# Altium PCB BACK_UP_04_10_Analizador_de_espectro.PcbDoc
Units mm, origin at the board's own origin, x right, y up, seen from the top; angles counter-clockwise.
Board outline 152.4 x 101.6 mm, 2 copper layers (Top Layer, Bottom Layer); 140 components, 98 nets, 612 pads, 218 vias.
Unrouted connection lines stored in the file: 103.
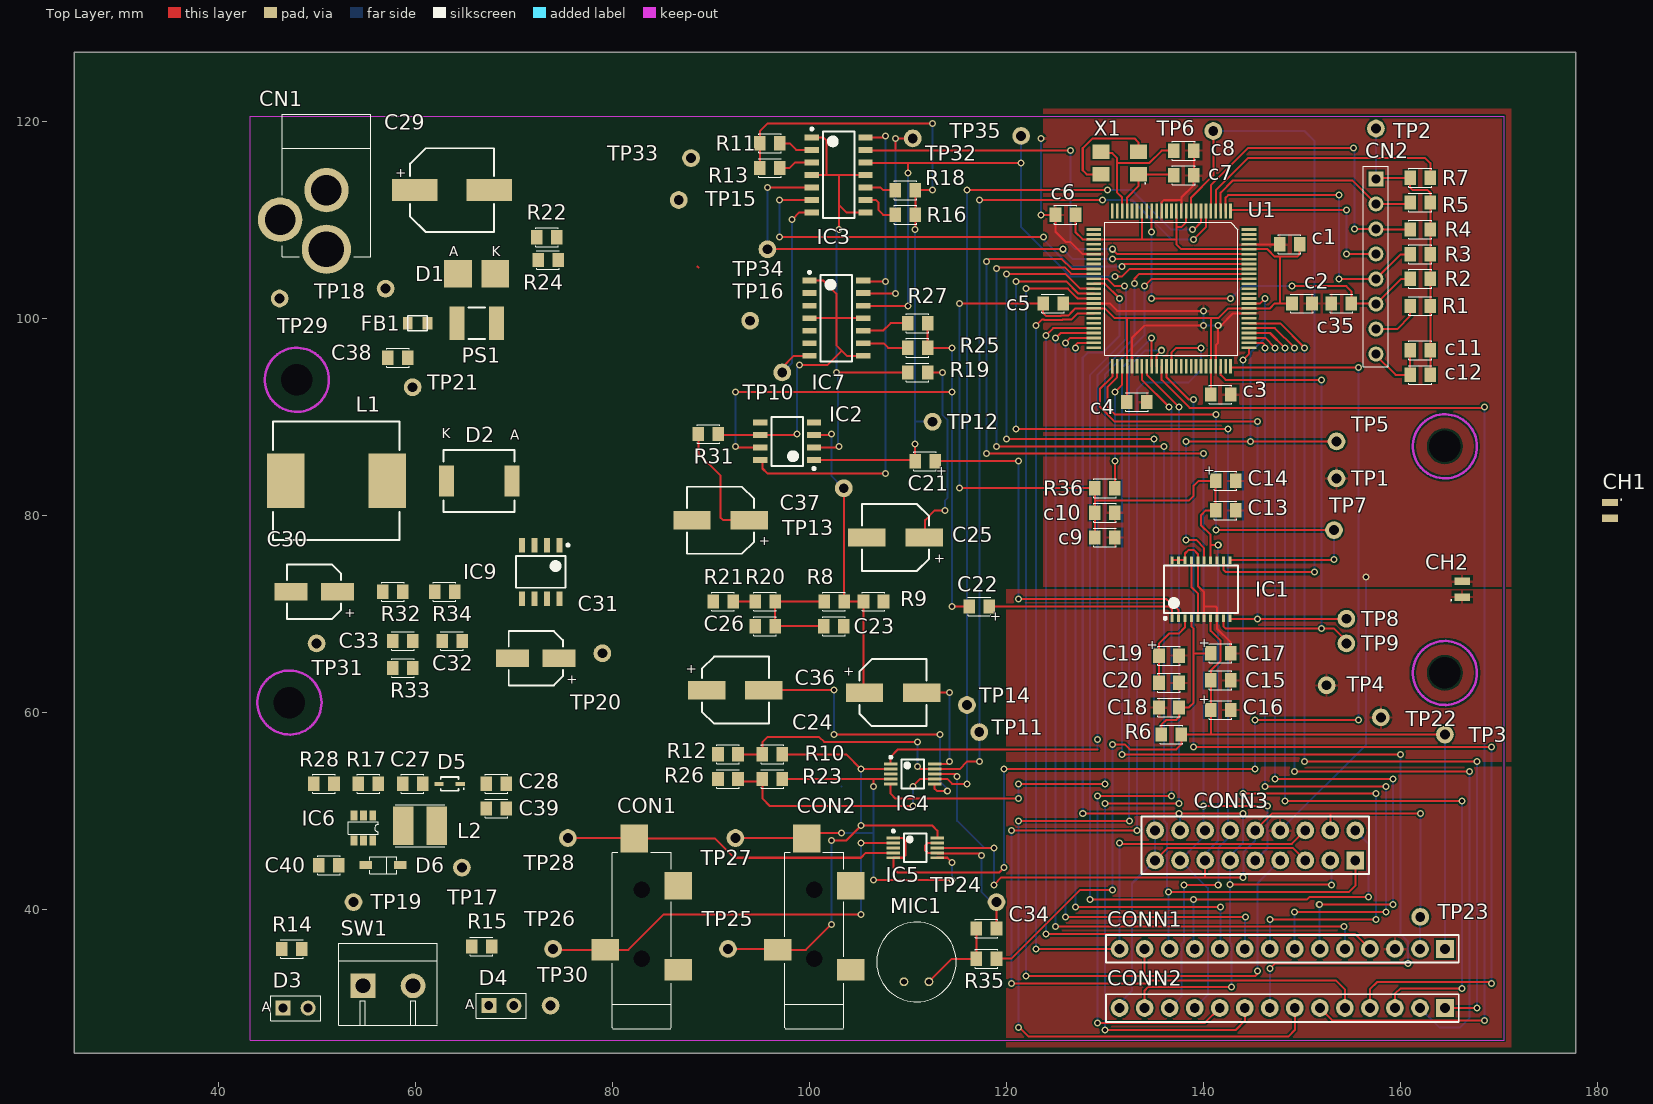
[diagram p0: Top Layer view]
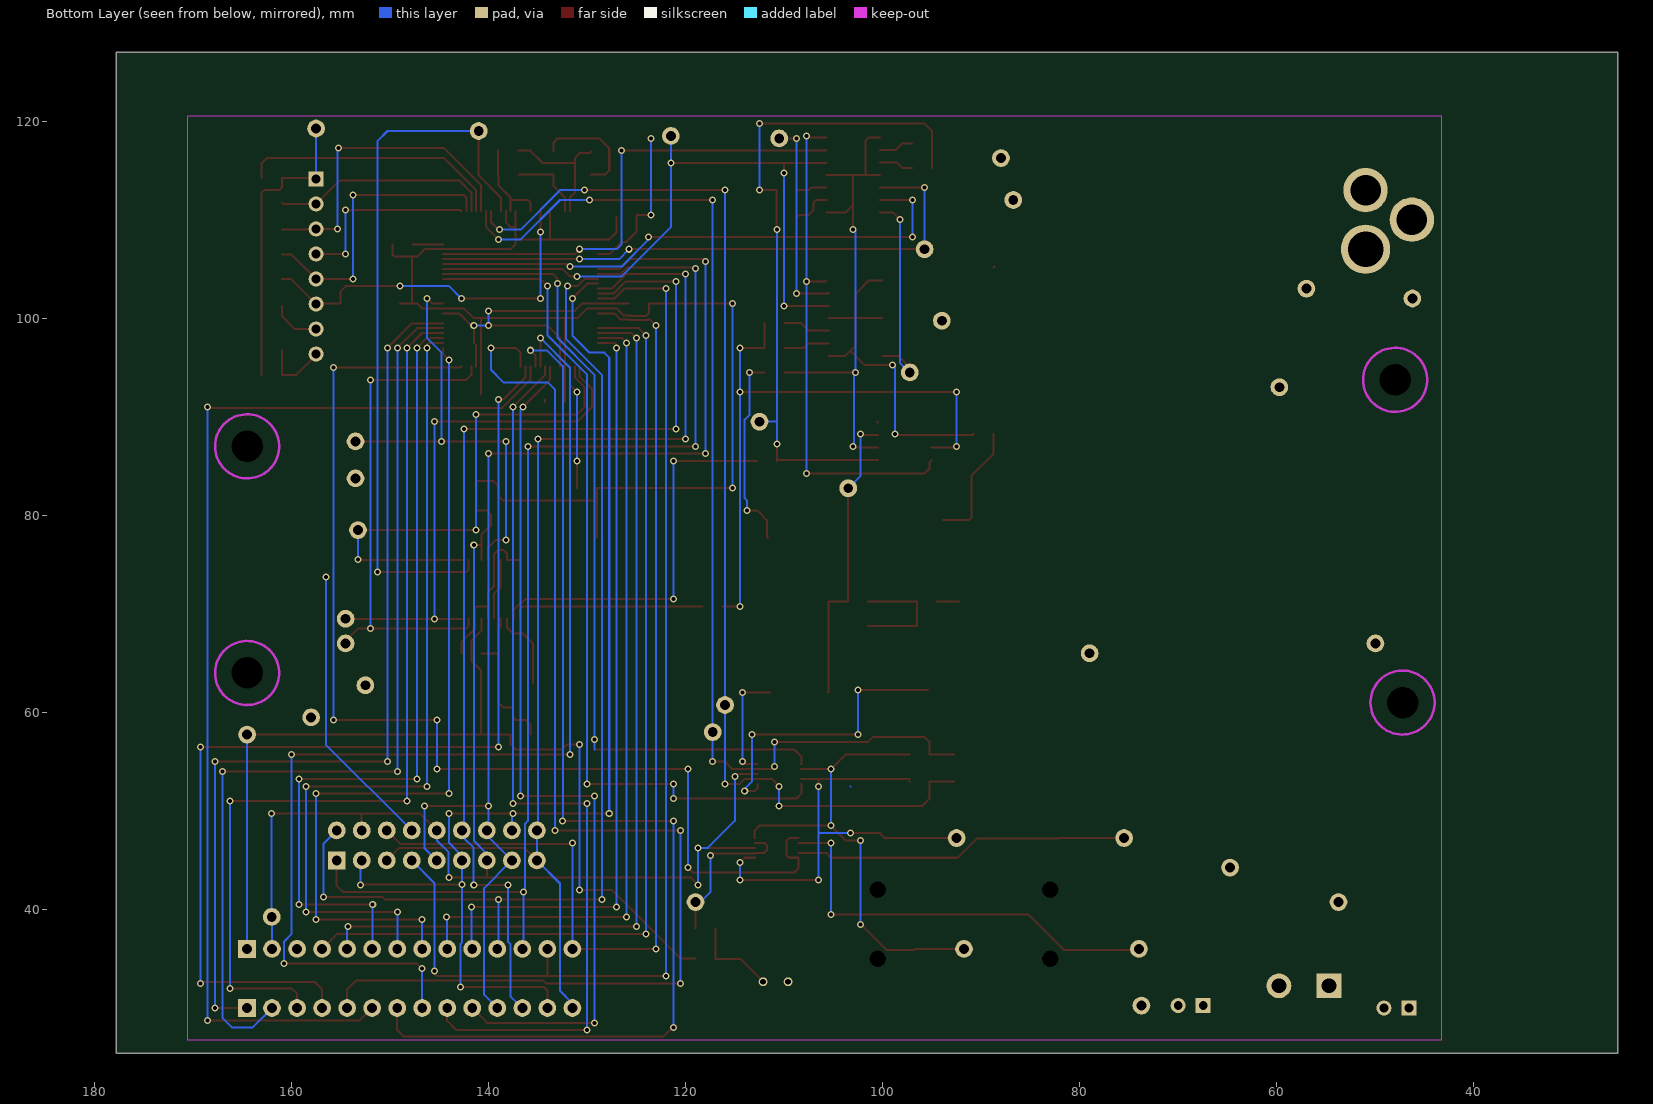
[diagram p1: Bottom Layer view, seen from below]

## Layer stack, top to bottom
Top Solder: solder mask 0.0102, Solder Resist, Dk 3.5
Top Layer: signal copper 0.0356
Dielectric 1: dielectric 0.32, FR-4, Dk 4.8
Bottom Layer: signal copper 0.0356
Bottom Solder: solder mask 0.0102, Solder Resist, Dk 3.5

## Board outline
25.4,25.4 177.8,25.4 177.8,127 25.4,127

## Design rules (kind name [scope] priority, off if disabled: settings)
Clearance [All] p1: gap=0.203
PolygonConnect [All] p1: connectstyle=Relief reliefconductorwidth=0.254 reliefentries=4 polygonreliefangle="90 Angle" airgapwidth=0.254
RoutingVias [All] p1: holewidth=0.406 width=0.711 viastyle="Through Hole" minholewidth=0.406 minwidth=0.711 maxholewidth=0.406 maxwidth=0.711
SolderMaskExpansion [All] p1: expansion=0.102
Width [All] p1: maxlimit=6.35 minlimit=0.203 preferedwidth=0.203
30 further rules are at their usual default settings.

## Classes and differential pairs
component class U_adc: C13 C14 C15 C16 C17 C18 C19 C20 C21 C22 IC1 R6 TP1 TP2 TP3 TP4 TP5 TP6 TP7 TP8 TP9 TP10
component class U_AGC: C23 C24 C25 C26 C36 C37 IC2 IC3 IC4 IC7 R8 R9 R10 R11 R12 R13 R16 R18 R19 R20 R21 R22 R23 R24 R25 R26 R27 R31 TP11 TP12 TP13 TP14 TP15 TP16 TP32 TP33 TP34 TP35
component class U_Fuente: C27 C28 C29 C30 C31 C32 C33 C38 C39 C40 CH1 CH2 CN1 D1 D2 D3 D4 D5 D6 FB1 IC6 IC9 L1 L2 PS1 R14 R15 R17 R28 R32 R33 R34 SW1 TP17 TP18 TP19 TP20 TP21 TP29 TP30 TP31
component class U_Signal_imputs: C34 CON1 CON2 IC5 MIC1 R35 TP22 TP23 TP24 TP25 TP26 TP27 TP28
component class U_uc: c1 c2 c3 c4 c5 c6 c7 c8 c9 c10 c11 c12 c35 CN2 CONN1 CONN2 CONN3 R1 R2 R3 R4 R5 R7 R36 U1 X1

## Components (designator, comment, footprint, x,y, rotation, side; value= is the part's Value field where it differs from the comment)
c1 "100nF 25V X7R Ceramic" C_0805 148.75,107.5 r180 top
c2 "100nF 25V X7R Ceramic" C_0805 150,101.5 r0 top
c3 "100nF 25V X7R Ceramic" C_0805 141.75,92.25 r0 top
c4 "100nF 25V X7R Ceramic" C_0805 133.25,91.5 r0 top
c5 "100nF 25V X7R Ceramic" C_0805 124.75,101.5 r0 top
c6 "100nF 25V X7R Ceramic" C_0805 126,110.5 r180 top
c7 "18pF 50V COG Ceramic" C_0805 138,114.5 r180 top
c8 "18pF 50V COG Ceramic" C_0805 138,117 r180 top
c9 "1uF 6V3 X7R Ceramic" C_0805 130,77.75 r0 top
c10 "10nF 25V X7R Ceramic" C_0805 130,80.25 r0 top
c11 "10nF 25V X7R Ceramic" C_0805 162,96.75 r180 top
c12 "100nF 25V X7R Ceramic" C_0805 162,94.25 r180 top
C13 "100nF 16V Ceramic" C_0805 142.25,80.5 r180 top
C14 "10uF 6V3 Tantalium" C_0805_POL 142.25,83.5 r0 top
C15 "100nF 16V Ceramic" C_0805 141.75,63.25 r180 top
C16 "10uF 6V3 Tantalium" C_0805_POL 141.75,60.25 r0 top
C17 "10uF 6V3 Tantalium" C_0805_POL 141.75,66 r0 top
C18 "100nF 16V Ceramic" C_0805 136.5,60.5 r0 top
C19 "10uF 6V3 Tantalium" C_0805_POL 136.5,65.75 r0 top
C20 "100nF 16V Ceramic" C_0805 136.5,63 r180 top
C21 "1uF 16V Tantalium" C_0805_POL 111.75,85.5 r180 top
C22 "1uF 16V Tantalium" C_0805_POL 117.25,70.75 r180 top
C23 "1uF 16V Ceramic" C_0805 102.5,68.75 r0 top
C24 "100uF 16V Elect. Alum." C_AE7066X54M 108.5,62 r0 top
C25 "100uF 16V Elect. Alum." C_AE7066X54M 108.75,77.75 r180 top
C26 "1uF 16V Ceramic" C_0805 95.516,68.75 r180 top
C27 "100nF 16V X7R" C_0805 59.75,52.75 r180 top
C28 "10uF 10V X7R" C_0805 68.25,52.75 r0 top
C29 "100uF 50V ElecAlum" C_AE10083X105M 63.75,113 r0 top
C30 "100uF 6V3 ElecAlum" C_AE6553X54M 49.75,72.25 r180 top
C31 "4.7uF 50V ElecAlum" C_AE6553X54M 72.25,65.5 r180 top
C32 "15nF 50V Ceramic" C_0805 63.75,67.25 r0 top
C33 "100pF 25V Ceramic" C_0805 58.75,67.25 r180 top
C34 "2.2u 6V3 X5R Ceramic" C_0805 117.979,38.06 r0 top
c35 "100nF 25V X7R Ceramic" C_0805 154,101.5 r180 top
C36 "100uF 16V Elect. Alum." C_AE7066X54M 92.5,62.25 r0 top
C37 "100uF 16V Elect. Alum." C_AE7066X54M 91,79.5 r180 top
C38 "100nF 35V Ceramic" C_0805 58.25,96 r180 top
C39 "10uF 10V X7R" C_0805 68.25,50.25 r0 top
C40 "2.2uF 50V X7R" C_0805 51.25,44.5 r0 top
CH1 "Choke" I_CHOQUE_DFN 181.25,80.5 r270 top
CH2 "Choke" I_CHOQUE_DFN 166.25,72.5 r90 top
CN1 "DC Jack" Jack_PJ002A 51,107 r90 top
CN2 "CONN_82" HDR_M_08P_0.1 157.5,105.25 r270 top
CON1 "AUD_IN" "AUDIO_JACK 3.5MM SMD" 83,38.5 r90 top
CON2 "AUD_IN" "AUDIO_JACK 3.5MM SMD" 100.5,38.5 r90 top
CONN1 "CON_14" "1x14x2.54 Pin Header TH V" 148,36 r180 top
CONN2 "CON_14" "1x14x2.54 Pin Header TH V" 148,30 r180 top
CONN3 "CON_18" "2x9x2.54 Pin Header TH V" 145.25,46.5 r180 top
D1 "CDBA140-G" D_DO-214AC_SCHOTTKY 66.25,104.5 r0 top
D2 "STPS3L40" D_M6959X25N 66.5,83.5 r180 top
D3 "LED" LED_TH 47.87,30 r0 top
D4 "LED" LED_TH 68.75,30.25 r0 top
D5 "1N4148WS" 1N4148WS 63.5,52.75 r180 top
D6 "MBRX160TP" SOD_123 56.75,44.5 r180 top
FB1 "Ferrite Bead" Ferrite_bead 61.25,99.5 r180 top
IC1 "PCM1802" SSOP_DB20 139.75,72.5 r90 top
IC2 "MCP6022" SOIC_D8 97.75,87.5 r180 top
IC3 "74LVC4066" SO14 102.985,114.549 r0 top
IC4 "TS5A23157" TSSOP50P490X110-10N 110.5,53.75 r0 top
IC5 "TS5A23157" TSSOP50P490X110-10N 110.75,46.25 r0 top
IC6 "MCP" SOT23_6P 54.75,48.25 r180 top
IC7 "74LVC4066" SO14 102.75,100 r0 top
IC9 "L5972D" SO8 72.75,74.25 r270 top
L1 "47uH" I_P128122X60N 26.25,97.25 r180 top
L2 "LQH44PN220MP0L" VLCF5028 60.5,48.5 r0 top
MIC1 "Mic" MIC_CMA-4544PF-W 110.871,34.671 r270 top
PS1 "Polyswitch" POLISWITCH_1 66.25,99.5 r180 top
R1 "10k 5% 1/8W" R_0805 162,101.25 r0 top
R2 "10k 5% 1/8W" R_0805 162,104 r0 top
R3 "10k 5% 1/8W" R_0805 162,106.5 r0 top
R4 "10k 5% 1/8W" R_0805 162,109 r0 top
R5 "10k 5% 1/8W" R_0805 162,111.75 r0 top
R6 "1k 1/8W" R_0805 136.75,57.75 r180 top
R7 "10k 5% 1/8W" R_0805 162,114.25 r180 top
R8 "100k 1/8W" R_0805 102.516,71.25 r180 top
R9 "100k 1/8W" R_0805 106.516,71.25 r180 top
R10 "100k 1/8W" R_0805 96.25,55.75 r180 top
R11 "590 1/8W" R_0805 96,117.75 r0 top
R12 "33k 1/8W" R_0805 91.75,55.75 r180 top
R13 "2k2 1/8W" R_0805 96,115.25 r0 top
R14 "Res1" R_0805 47.5,36 r180 top
R15 "Res1" R_0805 66.75,36.25 r180 top
R16 "3k9 1/8W" R_0805 109.75,110.5 r180 top
R17 "30k9 1%" R_0805 55.25,52.75 r0 top
R18 "100k 1/8W" R_0805 109.75,113 r180 top
R19 "1k 1/8W" R_0805 111,94.5 r0 top
R20 "100k 1/8W" R_0805 95.516,71.25 r0 top
R21 "100k 1/8W" R_0805 91.266,71.25 r0 top
R22 "590 1/8W" R_0805 73.374,108.204 r0 top
R23 "100k 1/8W" R_0805 96.25,53.25 r180 top
R24 "2k2 1/8W" R_0805 73.501,105.918 r0 top
R25 "3k9 1/8W" R_0805 111,97 r180 top
R26 "33k 1/8W" R_0805 91.75,53.25 r180 top
R27 "100k 1/8W" R_0805 111,99.5 r180 top
R28 "30k9 1%" R_0805 50.75,52.75 r0 top
R31 "1k 1/8W" R_0805 89.75,88.25 r180 top
R32 "8k2 1/4W" R_0805 57.75,72.25 r0 top
R33 "10k 1/4W" R_0805 58.75,64.5 r0 top
R34 "5k1 1/4W" R_0805 63,72.25 r180 top
R35 "2k2 1/8W" R_0805 117.979,35.012 r0 top
R36 "10k 5% 1/8W" R_0805 130,82.75 r180 top
SW1 "Switch" BORNERA_2X5MM 57.25,32.25 r180 top
TP1 "TP" TP 153.5,83.75 r0 top
TP2 "TP" TP 157.5,119.25 r0 top
TP3 "TP" TP 164.5,57.75 r0 top
TP4 "TP" TP 152.5,62.75 r0 top
TP5 "TP" TP 153.5,87.5 r0 top
TP6 "TP" TP 141,119 r0 top
TP7 "TP" TP 153.25,78.5 r0 top
TP8 "TP" TP 154.5,69.5 r0 top
TP9 "TP" TP 154.5,67 r0 top
TP10 "TP" TP 97.25,94.5 r90 top
TP11 "TP" TP 117.25,58 r0 top
TP12 "TP" TP 112.5,89.5 r90 top
TP13 "TP" TP 103.5,82.75 r90 top
TP14 "TP" TP 116,60.75 r90 top
TP15 "TP" TP 86.75,112 r90 top
TP16 "TP" TP 94,99.75 r90 top
TP17 "TP" TP 64.75,44.25 r90 top
TP18 "TP" TP 57,103 r90 top
TP19 "TP" TP 53.75,40.75 r90 top
TP20 "TP" TP 79,66 r90 top
TP21 "TP" TP 59.75,93 r0 top
TP22 "TP" TP 158,59.5 r90 top
TP23 "TP" TP 162,39.25 r90 top
TP24 "TP" TP 119,40.75 r90 top
TP25 "TP" TP 91.75,36 r90 top
TP26 "TP" TP 74,36 r90 top
TP27 "TP" TP 92.5,47.25 r90 top
TP28 "TP" TP 75.5,47.25 r90 top
TP29 "TP" TP 46.25,102 r90 top
TP30 "TP" TP 73.75,30.25 r90 top
TP31 "TP" TP 50,67 r0 top
TP32 "TP" TP 110.5,118.25 r90 top
TP33 "TP" TP 88,116.25 r90 top
TP34 "TP" TP 95.75,107 r90 top
TP35 "TP" TP 121.5,118.5 r90 top
U1 "LPC1769FBD100" LQFP100 136.75,103 r180 top
X1 "XTAL_HF" ABMC_XTAL 131.5,115.75 r180 top

## Footprints (in the part's own frame and the unit in brackets; to place one, negate y for a bottom-side part, rotate by r counter-clockwise, add the part's x,y. Pads: shape width x height; smd on the part's side, far side on the other; paste and mask are expansions set on the pad)
1N4148WS [mm] "SODFL, 2-Leads, Body 1.25x2.50mm, IPC Medium Density"
  rect 0.95x0.4 smd: 1(-1.075,0) 2(1.075,0)
  silkscreen extent -1.5,-0.7 0.9,0.7, body extent -0.9,-0.67 0.9,0.67, height 0.9
"1x14x2.54 Pin Header TH V" [mm] "1x14x2.54 Pin Header TH V"
  rect 1.8x1.8 hole 1: 1(-16.51,0)
  round 1.8 hole 1: 2(-13.97,0) 3(-11.43,0) 4(-8.89,0) 5(-6.35,0) 6(-3.81,0) 7(-1.27,0) 8(1.27,0) 9(3.81,0) 10(6.35,0) 11(8.89,0) 12(11.43,0) 13(13.97,0) 14(16.51,0)
  silkscreen extent -17.91,-1.4 17.91,1.4
"2x9x2.54 Pin Header TH V" [mm] "2x9x2.54 Pin Header TH V"
  rect 1.8x1.8 hole 1: 1(-10.16,1.524)
  round 1.8 hole 1: 2(-7.62,1.524) 3(-5.08,1.524) 4(-2.54,1.524) 5(0,1.524) 6(2.54,1.524) 7(5.08,1.524) 8(7.62,1.524) 9(10.16,1.524) 10(-10.16,-1.524) 11(-7.62,-1.524) 12(-5.08,-1.524) 13(-2.54,-1.524) 14(0,-1.524) 15(2.54,-1.524) 16(5.08,-1.524) 17(7.62,-1.524) 18(10.16,-1.524)
  silkscreen extent -11.56,-2.92 11.56,2.92
ABMC_XTAL [mm] "ABM3C-12.000MHZ-D4Y-T"
  rect 1.75x1.45 smd: 1(-1.9,1.15) 2(-1.9,-1.15) 3(1.9,-1.15) 4(1.9,1.15)
  silkscreen extent -2.63,2.03 -2.53,2.12, body extent -2.58,-1.68 2.57,1.68, height 1.3
"AUDIO_JACK 3.5MM SMD" [mm] "SJ-3524-SMT"
  rect 2.8x2.8 smd: 1(3.9,-3.7) 2(8.7,0.75)
  rect 2.2x2.8 smd: 3(-2.6,3.7) 4(-4.6,-3.7)
  round 0 hole 1.7: ""(-3.5,0) ""(3.5,0)
  silkscreen extent -10.6,-3 7.3,3
BORNERA_2X5MM [mm]
  rect 2.5x2.5 hole 1.5: 1(2.54,0)
  round 2.5 hole 1.5: 2(-2.54,0)
  silkscreen extent -5,-4.3 5,4
C_0805 [mm]
  rect 0.5x1.25 on Mech3: 0(-0.75,0) 0(0.75,0)
  rect 1.175x1.45 smd: 1(-1.016,0) 2(1.016,0)
  silkscreen extent -1.14,-0.95 1.14,0.95
C_0805_POL [mm]
  rect 0.5x1.25 on Mech3: 0(-0.75,0) 0(0.75,0)
  rect 1.175x1.45 smd: 1(-1.016,0) 2(1.016,0)
  silkscreen extent -1.14,-0.95 1.14,0.95
C_AE6553X54M [mm] "Aluminum Electrolytic Capacitor, 4.7uF, 50V"
  rect 3.35x1.8 smd: 1(-2.35,0) 2(2.35,0)
  silkscreen extent -2.75,-2.75 2.75,2.75, body extent -2.75,-2.75 2.75,2.75, height 5.4
C_AE7066X54M [mm] "Aluminum Electrolytic Capacitor, 100uF, 16V"
  rect 3.8x1.85 smd: 1(-2.9,0) 2(2.9,0)
  silkscreen extent -3.4,-3.4 3.4,3.4, body extent -3.4,-3.4 3.4,3.4, height 5.4
C_AE10083X105M [mm] "Aluminum Electrolytic Capacitor, 100uF, 50V"
  rect 4.6x2.25 smd: 1(-3.775,0) 2(3.775,0)
  silkscreen extent -4.25,-4.25 4.25,4.25, body extent -4.25,-4.25 4.25,4.25, height 10.5
D_DO-214AC_SCHOTTKY [mm] "CDBA140-G"
  rect 2.8x2.8 smd: 1(-1.9,0) 2(1.9,0)
  body extent -2.25,-1.4 2.25,1.39, height 2.29
D_M6959X25N [mm] "Diodo STPS3L40-Y"
  rect 1.54x3.14 smd: 1(-3.325,0) 2(3.325,0)
  silkscreen extent -3.6,-3.15 3.6,3.15, body extent -3.57,-3.13 3.57,3.13, height 2.45
Ferrite_bead [mm]
  rect 1x1.25 smd: 1(0,0) 2(2,0)
  silkscreen extent 0,-0.75 2,0.75
HDR_M_08P_0.1 [mil]
  rect 60x60 hole 35: 1(-350,0)
  round 60 hole 35: 2(-250,0) 3(-150,0) 4(-50,0) 5(50,0) 6(150,0) 7(250,0) 8(350,0)
  silkscreen extent -400,-50 400,50
I_CHOQUE_DFN [mm] "Chip Power Inductor BRC2012T2R2MD"
  rect 0.75x1.6 smd: 1(-0.8,0) 2(0.8,0)
  silkscreen extent -1.15,1.08 -1.05,1.17, body extent -1.1,-0.72 1.1,0.72, height 1.4
I_P128122X60N [mm] "Inductor SMD 744771147"
  rect 3.8x5.5 smd: 1(-30.9,13.75) 2(-20.6,13.75)
  silkscreen extent -32.15,7.75 -19.35,19.75, body extent -32.15,7.75 -19.35,19.75, height 6
Jack_PJ002A [mm]
  round 5 hole 3.6: 1(0,0)
  round 4.5 hole 3.1: 2(6,0) 3(3,4.7)
  silkscreen extent -0.75,-4.5 13.7,4.5
LED_TH [mil]
  rect 60x60 hole 35 paste+0: 1(-50,0)
  round 60 hole 35 paste+0: 2(50,0)
  silkscreen extent -100,-50 100,50
LQFP100 [mm]
  rect 0.27x1.5 smd: 1(-6,-7.875) 2(-5.5,-7.875) 3(-5,-7.875) 4(-4.5,-7.875) 5(-4,-7.875) 6(-3.5,-7.875) 7(-3,-7.875) 8(-2.5,-7.875) 9(-2,-7.875) 10(-1.5,-7.875) 11(-1,-7.875) 12(-0.5,-7.875) 13(0,-7.875) 14(0.5,-7.875) 15(1,-7.875) 16(1.5,-7.875) 17(2,-7.875) 18(2.5,-7.875) 19(3,-7.875) 20(3.5,-7.875) 21(4,-7.875) 22(4.5,-7.875) 23(5,-7.875) 24(5.5,-7.875) 25(6,-7.875) 51(6,7.875) 52(5.5,7.875) 53(5,7.875) 54(4.5,7.875) 55(4,7.875) 56(3.5,7.875) 57(3,7.875) 58(2.5,7.875) 59(2,7.875) 60(1.5,7.875) 61(1,7.875) 62(0.5,7.875) 63(0,7.875) 64(-0.5,7.875) 65(-1,7.875) 66(-1.5,7.875) 67(-2,7.875) 68(-2.5,7.875) 69(-3,7.875) 70(-3.5,7.875) 71(-4,7.875) 72(-4.5,7.875) 73(-5,7.875) 74(-5.5,7.875) 75(-6,7.875)
  rect 1.5x0.27 smd: 26(7.875,-6) 27(7.875,-5.5) 28(7.875,-5) 29(7.875,-4.5) 30(7.875,-4) 31(7.875,-3.5) 32(7.875,-3) 33(7.875,-2.5) 34(7.875,-2) 35(7.875,-1.5) 36(7.875,-1) 37(7.875,-0.5) 38(7.875,0) 39(7.875,0.5) 40(7.875,1) 41(7.875,1.5) 42(7.875,2) 43(7.875,2.5) 44(7.875,3) 45(7.875,3.5) 46(7.875,4) 47(7.875,4.5) 48(7.875,5) 49(7.875,5.5) 50(7.875,6) 76(-7.875,6) 77(-7.875,5.5) 78(-7.875,5) 79(-7.875,4.5) 80(-7.875,4) 81(-7.875,3.5) 82(-7.875,3) 83(-7.875,2.5) 84(-7.875,2) 85(-7.875,1.5) 86(-7.875,1) 87(-7.875,0.5) 88(-7.875,0) 89(-7.875,-0.5) 90(-7.875,-1) 91(-7.875,-1.5) 92(-7.875,-2) 93(-7.875,-2.5) 94(-7.875,-3) 95(-7.875,-3.5) 96(-7.875,-4) 97(-7.875,-4.5) 98(-7.875,-5) 99(-7.875,-5.5) 100(-7.875,-6)
  silkscreen extent -6.75,-6.75 6.75,6.75
MIC_CMA-4544PF-W [mm] "CMA-4544PF-W"
  round 0.9 hole 0.6: 1(2,1.27) 2(2,-1.27)
  silkscreen extent -4.04,-4.03 4.04,4.04
POLISWITCH_1 [mm]
  rect 1.55x3.4 smd: 1(-2,0) 2(2,0)
  silkscreen extent -0.85,-1.6 0.85,1.6, body extent -2.42,-1.71 2.41,1.71, height 0.85
R_0805 [mm]
  rect 0.4x1.25 on Mech3: 0(-0.8,0) 0(0.8,0)
  rect 1.175x1.45 smd: 1(-1.016,0) 2(1.016,0)
  silkscreen extent -1.14,-0.95 1.14,0.95
SO8 [mm] "Switching Regulator L5972D"
  rect 1.45x0.6 smd: 1(-2.725,1.905) 2(-2.725,0.635) 3(-2.725,-0.635) 4(-2.725,-1.905) 5(2.725,-1.905) 6(2.725,-0.635) 7(2.725,0.635) 8(2.725,1.905)
  silkscreen extent -2.85,-2.5 1.6,2.88, body extent -2,-2.5 2,2.5, height 1.75
SO14 [mm] "Quad_Bilateral_Switch 74LVC4066"
  rect 1.45x0.6 smd: 1(-2.725,3.81) 2(-2.725,2.54) 3(-2.725,1.27) 4(-2.725,0) 5(-2.725,-1.27) 6(-2.725,-2.54) 7(-2.725,-3.81) 8(2.725,-3.81) 9(2.725,-2.54) 10(2.725,-1.27) 11(2.725,0) 12(2.725,1.27) 13(2.725,2.54) 14(2.725,3.81)
  silkscreen extent -2.85,-4.4 1.6,4.78, body extent -2,-4.4 2,4.4, height 1.75
SOD_123 [mm]
  rect 1.25x0.8 smd: 1(1.75,0) 2(-1.75,0)
  silkscreen extent -1.38,-0.88 1.38,0.88
SOIC_D8 [mm] "MCP6022"
  rect 1.45x0.6 smd: 1(-2.725,1.905) 2(-2.725,0.635) 3(-2.725,-0.635) 4(-2.725,-1.905) 5(2.725,-1.905) 6(2.725,-0.635) 7(2.725,0.635) 8(2.725,1.905)
  silkscreen extent -2.85,-2.5 1.6,2.88, body extent -2,-2.5 2,2.5, height 1.75
SOT23_6P [mil]
  rect 27x40 smd: 1(-37.5,-50) 2(0,-50) 3(37.5,-50) 4(37.5,50) 5(0,50) 6(-37.5,50)
  silkscreen extent -60,-25 60,25
SSOP_DB20 [mm] "PCM1802 Single-Ended Analog-Input 24-Bit"
  rect 0.75x0.3 smd: 1(-2.95,2.925) 2(-2.95,2.275) 3(-2.95,1.625) 4(-2.95,0.975) 5(-2.95,0.325) 6(-2.95,-0.325) 7(-2.95,-0.975) 8(-2.95,-1.625) 9(-2.95,-2.275) 10(-2.95,-2.925) 11(2.95,-2.925) 12(2.95,-2.275) 13(2.95,-1.625) 14(2.95,-0.975) 15(2.95,-0.325) 16(2.95,0.325) 17(2.95,0.975) 18(2.95,1.625) 19(2.95,2.275) 20(2.95,2.925)
  silkscreen extent -3.07,-3.75 2.4,3.75, body extent -2.8,-3.75 2.8,3.75, height 2
TP [mm]
  round 1.8 hole 1: 1(0,0)
TSSOP50P490X110-10N [mm] "TSSOP, 10-Leads, Body 3.00x3.00mm, Pitch 0.50mm, IPC Medium Density"
  rect 1.35x0.3 smd: 1(-2.225,1) 2(-2.225,0.5) 3(-2.225,0) 4(-2.225,-0.5) 5(-2.225,-1) 6(2.225,-1) 7(2.225,-0.5) 8(2.225,0) 9(2.225,0.5) 10(2.225,1)
  silkscreen extent -2.35,-1.45 1.15,1.82, body extent -1.55,-1.45 1.55,1.45, height 1.1
VLCF5028 [mm]
  rect 2.1x3.9 smd: 1(-1.7,0) 2(1.7,0)
  silkscreen extent -2.5,-2.12 2.5,2.12

## Part data
c1 c2 c3 c4 c5 c6 c7 c8 c9 c10 c11 c12 C13 C15 C18 C20 C23 C26 C27 C28 C32 C33 C34 c35 C38 C39 C40: library part Cap1, "Capacitor"
C14 C16 C17 C19 C21 C22 C24 C25 C29 C30 C31 C36 C37: library part Cap_Elec, "Capacitor"
CN1: library part Barrel_jack, "Connector"
CON1 CON2: library part Jack_1
CONN1 CONN2: "CONN TFT 3.5"
CONN3: "CON_TFT_2.8"
D1: library part Diodo_Schottky, "Diodo Schottky"
D2: library part DIODO, "Diode"
D5: library part DIODO, "Diode signal"
D6: library part Diodo_Schottky
IC2: library part OpAmp_Dual
IC3 IC7: library part Q_B_Switch_2
IC4 IC5: library part A_SW_2x2:1_VSSOP, "Analog Switch"
IC6: library part "Sw Source", "Switching Source"
IC9: "Fuente Switching"
L1 L2: library part Inductor, "Inductor"
MIC1: "Microfono"
PS1: library part Poliswitch, "Polishwitch"
R1 R2 R3 R4 R5 R6 R7 R8 R9 R10 R11 R12 R13 R16 R17 R18 R19 R20 R21 R22 R23 R24 R25 R26 R27 R28 R31 R32 R33 R34 R35 R36: library part Res1, "Resistor"
R14 R15: "Resistor"
SW1: library part SW
TP1 TP2 TP3 TP4 TP5 TP6 TP7 TP8 TP9 TP10 TP11 TP12 TP13 TP14 TP15 TP16 TP17 TP18 TP19 TP20 TP21 TP22 TP23 TP24 TP25 TP26 TP27 TP28 TP29 TP30 TP31 TP32 TP33 TP34 TP35: library part "Test Point", "Test Point"
U1: library part LPC1768FBD100, "CPU Cortex M3"
X1: "Crystal"

## Free pads (board coordinates)
  round 0 hole 3.2: M_HOLE(47.25,61) M_HOLE(48,93.75) M_HOLE(164.5,64) M_HOLE(164.5,87)

## Via types
v1: diameter 0.711, hole 0.406, Top Layer to Bottom Layer, 218 vias

## Nets (pads, with @x,y where several pads share a name; then routed paths per layer and width w, separated by ;. In a path a pad name is that pad's centre, name@x,y a point inside that pad or via, vN(x,y) a via of type N, cw(c..) or ccw(c..) an arc to the next point about the centre after c; other vN are vias at no path point)
+5V: C15.2 C16.1 C23.1 C26.1 C28.1 C39.1 CONN1.1 D5.1 IC1.5 IC1.7 IC1.17 IC2.8 IC3.14 IC7.14 L2.2 R6.1 R8.2 R17.2 R20.2 R35.2 TP3.1 TP17.1 | length 169.6
  Top Layer w0.203: IC2.8 95.25,85.37 95.25,84.75 95.75,84.25 v1(107.75,84.25) ; C23.1 C26.1 R20.2 R8.2 ; IC3.14 107.609,118.359 v1(107.75,118.5) ; IC7.14@105.725,103.81 105.785,103.75 v1(107.75,103.75) ; R35.2 120.512,35.012 127.5,42 v1(130.75,42) ; v1(130.75,56.75) 132,56.75 132.5,56.25 137.25,56.25 137.766,56.766 R6.1 140.75,57.75 ; IC1.17 138.775,72.725 139.425,72.075 IC1.5 ; IC1.7 140.725,68.275 141.75,67.25 141.75,65.25 140.75,64.25 140.75,57.75 ; TP3.1 140.75,57.75
  Bottom Layer w0.203: v1(107.75,84.25) v1(107.75,103.75) v1(107.75,118.5) ; v1(130.75,42) v1(130.75,56.75) ; TP3.1 164.5,36.01 CONN1.1
AGND: C15.1 C16.2 C17.2 C18.1 C19.2 C20.1 C23.2 C25.2 C26.2 C28.2 C37.2 C39.2 C40.2 CH1.2 CH2.1 CON1.1 CON2.1 D4.2 D6.1 IC1.6 IC1.8 IC1.16 IC1.18 IC1.19 IC1.20 IC2.4 IC3.7 IC4.3 IC5.3 IC6.2 IC7.7 MIC1.2 R9.1 R12.2 R21.1 R26.2 R28.1 TP4.1 TP10.1 TP22.1 TP30.1 | length 39.1
  Top Layer w0.203: TP10.1 97.25,95 98.44,96.19 IC7.7 ; v1(98.25,110) 98.989,110.739 IC3.7 ; IC2.4 IC2.4@100.57,89.5 ; IC1.20 IC1.19 IC1.18 138.125,76.125 138.5,76.5 139,76.5 139.425,76.075 IC1.16 139.425,72.825 140.075,72.175 IC1.6 ; 140.075,70.75 141.25,70.75 141.375,70.625 IC1.8 141.375,68.5 142.766,67.109 C17.2
  Bottom Layer w0.203: TP10.1 98.25,95.5 v1(98.25,110)
CTRL_MUX: IC5.1 IC5.5 U1.75 | length 116.6
  Top Layer w0.203: IC5.1 109.5,47.25 109.75,47 109.75,45.5 109.5,45.25 IC5.5 108.525,44.225 109,43.75 119.25,43.75 v1(119.75,44.25) ; v1(119.75,54.25) v1(145.25,54.25) ; U1.75 142.875,95 v1(155.75,95) ; v1(145.25,59.25) v1(155.75,59.25)
  Bottom Layer w0.203: v1(119.75,44.25) v1(119.75,54.25) ; v1(145.25,54.25) v1(145.25,59.25) ; v1(155.75,59.25) v1(155.75,95)
D/C: CONN1.11 CONN3.10 U1.36 | length 108
  Top Layer w0.203: v1(128.5,41) v1(139,41) 150.5,41 150.75,41.25 v1(156.75,41.25) ; U1.36 130.25,104 131,103.25 v1(132,103.25)
  Bottom Layer w0.203: v1(128.5,41) 128.5,94.25 132.16,97.91 132.16,103.089 v1(132,103.25) ; v1(139,41) 139,36.11 CONN1.11 ; CONN3.10 156.75,46.684 v1(156.75,41.25)
E1: IC3.13 IC7.13 TP32.1 U1.95 | length 70.9
  Top Layer w0.203: IC7.13 105.515,102.5 v1(108.75,102.5) ; IC3.13 105.799,117 108.75,117 ; TP32.1 v1(108.75,118.25) 108.75,117 ; v1(126.5,117) 108.75,117 ; v1(130.75,107) 131.25,106.5 U1.95
  Bottom Layer w0.203: v1(108.75,102.5) v1(108.75,118.25) ; v1(126.5,117) 126.5,107.5 127,107 v1(130.75,107)
E2: IC3.5 IC7.5 TP34.1 U1.94 | length 60.1
  Top Layer w0.203: TP34.1 v1(125.75,107) ; v1(95.75,113.25) 100.26,113.25 IC3.5 ; v1(130.75,106) U1.94
  Bottom Layer w0.203: TP34.1 v1(95.75,113.25) ; v1(125.75,107) 126.75,106 v1(130.75,106)
E3: IC3.6 IC7.6 TP33.1 U1.93 | length 56.1
  Top Layer w0.203: v1(97,108.25) v1(123.75,108.25) ; v1(97,112) 100.251,112 IC3.6 ; v1(131.75,105.25) 132,105.5 U1.93
  Bottom Layer w0.203: v1(97,108.25) v1(97,112) ; v1(123.75,108.25) 123.75,108 126.5,105.25 v1(131.75,105.25)
E4: IC3.12 IC7.12 TP35.1 U1.92 | length 69.6
  Top Layer w0.203: IC7.12 105.495,101.25 v1(110,101.25) ; IC3.12 105.779,115.75 110,115.75 ; v1(110,114.75) 110,115.75 ; v1(121.5,115.75) 110,115.75 ; v1(131,104.25) 131.75,104.25 132.5,105 U1.92
  Bottom Layer w0.203: v1(110,101.25) v1(110,114.75) ; TP35.1 v1(121.5,115.75) 121.5,109.25 126.5,104.25 v1(131,104.25)
EARTH: C29.2 C31.2 C38.2 CH1.1 CN1.2 CN1.3 D3.2 TP29.1
GND: c1.2 c2.2 c3.2 c4.2 c5.2 c6.2 c7.1 c8.1 c9.2 c10.2 C13.1 C14.2 C30.2 C33.2 c35.2 CH2.2 CONN1.3 CONN3.13 D2.1 IC1.13 IC9.2 IC9.3 IC9.6 IC9.7 R33.1 R34.1 TP1.1 TP31.1 U1.11 U1.15 U1.31 U1.41 U1.55 U1.72 U1.83 U1.97 | length 93.9
  Top Layer w0.203: v1(123.5,110.5) c6.2 ; c6.2@124.984,110.25 124.984,108.766 126,107.75 126.5,107.75 127.75,106.5 U1.31 ; c5.2 U1.41 130.5,101.5 131.25,100.75 v1(140,100.75) ; U1.55 132.75,98 134,99.25 v1(140,99.25) ; c4.2 c4.2@134.266,91.766 ; U1.15 135.75,111.75 136,112 137.75,112 ; U1.11 137.75,112 ; c8.1 c7.1 139,114.484 139,113.5 137.75,112.25 137.75,112 ; U1.72 141.25,97.25 141.5,97.5 v1(141.5,99.25) 141.75,99.25 143,100.5 U1.83 ; U1.97 146.734,107.5 c1.2
  Bottom Layer w0.203: v1(123.5,110.5) v1(123.5,118.25) ; v1(140,100.75) v1(140,99.25) v1(141.5,99.25) ; CONN3.13 156.5,56.734 v1(156.5,73.75)
GPIO0.0: CONN1.4 U1.46 | length 99.4
  Top Layer w0.203: v1(124,37.5) 155.39,37.5 CONN1.4 ; v1(124,98.25) 124.75,99 U1.46
  Bottom Layer w0.203: v1(124,37.5) v1(124,98.25)
GPIO0.1: CONN1.5 U1.47 | length 95.4
  Top Layer w0.203: v1(125,38.25) v1(154.25,38.25) ; v1(125,98) 125.5,98.5 U1.47
  Bottom Layer w0.203: v1(125,38.25) v1(125,98) ; v1(154.25,38.25) 154.35,38.15 CONN1.5
GPIO0.4: CONN2.1 U1.81 | length 94.4
  Top Layer w0.203: U1.81 144.625,99.473 147.777,99.473 v1(150.25,97) ; v1(150.25,55) v1(167.75,55) ; CONN2.1 v1(167.75,30)
  Bottom Layer w0.203: v1(150.25,55) v1(150.25,97) ; v1(167.75,30) v1(167.75,55)
GPIO0.5: CONN2.2 U1.80 | length 97.5
  Top Layer w0.203: U1.80 147.25,99 v1(149.25,97) ; v1(149.25,54) v1(167,54)
  Bottom Layer w0.203: v1(149.25,54) v1(149.25,97) ; CONN2.2 163.97,28 166,28 167,29 v1(167,54)
GPIO0.6: CONN2.3 U1.79 | length 95.7
  Top Layer w0.203: U1.79 146.75,98.5 v1(148.25,97) ; v1(148.25,51) v1(166.25,51) ; CONN2.3 159.43,31.43 160,32 v1(166.25,32)
  Bottom Layer w0.203: v1(148.25,51) v1(148.25,97) ; v1(166.25,32) v1(166.25,51)
GPIO0.15: CONN2.4 U1.62 | length 109.4
  Top Layer w0.203: U1.62 136.25,94 138.5,91.75 v1(139,91.75) ; v1(139,56.466) v1(169.25,56.466) ; CONN2.4 156.89,31.89 157.66,32.66 169.09,32.66 v1(169.25,32.5)
  Bottom Layer w0.203: v1(139,56.466) 139,56.251 v1(139,91.75) ; v1(169.25,32.5) v1(169.25,56.466)
GPIO0.16: CONN2.5 U1.63 | length 123.4
  Top Layer w0.203: v1(120.5,32.5) 134.175,32.5 134.484,32.809 153.441,32.809 154.35,31.9 CONN2.5 ; v1(120.5,48) v1(133.25,48) ; U1.63 136.75,96.5 137.25,97 v1(139.75,97)
  Bottom Layer w0.203: v1(120.5,32.5) v1(120.5,48) ; v1(133.25,48) 133.25,92.75 134,93.5 138.5,93.5 139.75,94.75 v1(139.75,97)
GPIO0.17: CONN2.6 U1.61 | length 114.8
  Top Layer w0.203: U1.61 135.75,93.75 138.59,90.91 168.41,90.91 v1(168.5,91) ; CONN2.6 153.06,28.75 v1(168.5,28.75)
  Bottom Layer w0.203: v1(168.5,28.75) v1(168.5,91)
GPIO0.18: CONN2.7 U1.60 | length 115.1
  Top Layer w0.203: v1(121.25,28) 121.34,28 122.25,27.09 148.59,27.09 149.27,27.77 CONN2.7 ; v1(121.25,49) v1(132.5,49) ; U1.60 135.25,96.25 v1(135.75,96.75)
  Bottom Layer w0.203: v1(121.25,28) v1(121.25,49) ; v1(132.5,49) 132.463,49.037 132.463,95.138 134.075,96.75 v1(135.75,96.75)
GPIO0.19: CONN2.8 U1.59 | length 114.4
  Top Layer w0.203: v1(131.75,55.75) v1(160,55.75) ; U1.59 v1(134.75,98) ; CONN2.8 CONN2.8@146.75,30.02 ; v1(146.75,34) 147.25,34.5 v1(160.75,34.5)
  Bottom Layer w0.203: v1(131.75,55.75) 131.75,95 v1(134.75,98) ; CONN2.8 146.75,30.02 v1(146.75,34) ; v1(160,55.75) 160,37.5 160.75,36.75 v1(160.75,34.5)
GPIO0.20: CONN2.9 U1.58 | length 92.1
  Top Layer w0.203: v1(130,27.75) 143.25,27.75 144.19,28.69 CONN2.9 ; v1(130,50.75) v1(137.5,50.75) ; U1.58 134.25,94.25 v1(137.5,91)
  Bottom Layer w0.203: v1(130,27.75) v1(130,50.75) ; v1(137.5,50.75) v1(137.5,91)
GPIO0.21: CONN2.10 U1.57 | length 88.7
  Top Layer w0.203: v1(129.25,28.5) 140.15,28.5 CONN2.10 ; v1(129.25,51.5) v1(136.75,51.5) ; U1.57 133.75,93.755 133.755,93.755 136.5,91.01 v1(136.5,91)
  Bottom Layer w0.203: v1(129.25,28.5) 129.5,28.5 129.25,28.75 v1(129.25,51.5) ; v1(136.5,91) 136.75,90.75 v1(136.75,51.5)
L-CH: CON1.2 IC5.4 TP28.1 | length 34.1
  Top Layer w0.203: TP28.1 82.2,47.25 CON1.2 90.45,47.2 92.4,45.25 105.25,45.25 105.75,45.75 IC5.4
LCD_CS: CONN1.7 U1.77 | length 84.5
  Top Layer w0.203: U1.77 146,97.5 146.25,97.25 v1(146.25,97) ; v1(146.25,52.5) v1(158.5,52.5) ; v1(149.25,39.75) v1(158.5,39.75)
  Bottom Layer w0.203: v1(146.25,52.5) v1(146.25,97) ; v1(149.25,39.75) 149.25,36.02 CONN1.7 ; v1(158.5,39.75) v1(158.5,52.5)
LCD_RD: CONN1.10 U1.49 | length 78
  Top Layer w0.203: v1(127,40.25) v1(141.75,40.25) ; v1(127,97) 127,97.25 127.25,97.5 U1.49
  Bottom Layer w0.203: v1(127,40.25) v1(127,97) ; CONN1.10 141.75,36.1 v1(141.75,40.25)
LCD_RS: CONN1.8 U1.76 | length 85.5
  Top Layer w0.203: v1(144,51.75) v1(157.5,51.75) ; v1(144,95.75) 144.625,96.375 U1.76 ; v1(146.75,39) v1(157.5,39)
  Bottom Layer w0.203: v1(144,51.75) v1(144,95.75) ; CONN1.8 146.75,36.02 v1(146.75,39) ; v1(157.5,39) v1(157.5,51.75)
LCD_RST: CONN1.6 U1.78 | length 83.6
  Top Layer w0.203: U1.78 146.25,98 v1(147.25,97) ; v1(147.25,53.25) v1(159.25,53.25) ; v1(151.75,40.5) v1(159.25,40.5)
  Bottom Layer w0.203: v1(147.25,53.25) v1(147.25,97) ; v1(151.75,40.5) 151.75,36.06 CONN1.6 ; v1(159.25,40.5) v1(159.25,53.25)
LCD_WR: CONN1.9 U1.48 | length 82.9
  Top Layer w0.203: v1(126,39.25) v1(144.25,39.25) ; v1(126,97.5) 126.5,98 U1.48
  Bottom Layer w0.203: v1(126,39.25) v1(126,97.5) ; CONN1.9 144.19,39.19 v1(144.25,39.25)
MIC-CH: C34.2 IC5.7 IC5.9 TP24.1 | length 16.1
  Top Layer w0.203: IC5.9 112,46.75 111.75,46.5 111.75,46 112,45.75 IC5.7 113.02,45.705 117.295,45.705 v1(117.5,45.5) ; C34.2 118.995,40.745 TP24.1
  Bottom Layer w0.203: v1(117.5,45.5) 117.5,41.75 118.5,40.75 TP24.1
MISO: CONN2.13 CONN3.2 CONN3.6 CONN3.17 U1.37 | length 117.7
  Top Layer w0.203: v1(127.75,49.75) v1(137.5,49.75) v1(144,49.75) ; U1.37 130,103.5 v1(131.5,102) ; CONN2.13 134.03,31.78 134.398,32.148 v1(142.852,32.148) ; v1(142.71,42.54) 152.96,42.54 v1(153,42.5)
  Bottom Layer w0.203: v1(127.75,49.75) 127.75,96 128.253,96.503 129.753,96.503 131.5,98.25 v1(131.5,102) ; CONN2.13@134,30.03 CONN2.13 ; CONN3.17 v1@137.63,49.75 ; v1(142.852,32.148) 142.855,32.152 142.855,36.499 142.71,36.644 v1(142.71,42.54) CONN3.6 142.71,45.46 144,46.75 v1(144,49.75) ; CONN3.2 153,44.846 v1(153,42.5)
MOSI: CONN2.14 CONN3.3 CONN3.9 CONN3.18 U1.38 | length 116.8
  Top Layer w0.203: v1(120,87.75) v1(135,87.75) ; v1(120,104.5) 125.991,104.5 127.491,103 U1.38 ; CONN3.9 136.364,46.25 149.056,46.25 CONN3.3
  Bottom Layer w0.203: v1(120,87.75) v1(120,104.5) ; CONN2.14 131.49,30.49 132.75,31.75 132.75,42.636 CONN3.9 CONN3.18 135,48.114 v1(135,87.75)
Netc7_2: c7.2 U1.22 X1.1 | length 7.7
  Top Layer w0.203: U1.22 132.25,112.25 133.4,113.4 X1.1 c7.2@136.884,114.6
Netc8_2: c8.2 U1.23 X1.3 | length 13.8
  Top Layer w0.203: X1.3 129.75,116.75 130.75,116.75 131.25,116.25 131.25,115.75 ; U1.23 131.75,112.25 131.25,112.75 131.25,115.75 ; c8.2 135.75,117 134.5,115.75 131.25,115.75
Netc11_2: c11.2 c12.2 CN2.8 | length 6.9
  Top Layer w0.203: CN2.8 157.5,96.25 159.5,94.25 c12.2 c11.2
NetC17_1: C17.1 C18.2 IC1.4 R6.2 | length 16.1
  Top Layer w0.203: R6.2 135.734,58.734 136.25,59.25 137.25,59.25 137.516,59.516 C18.2 138.5,60.5 139,61 139,66 ; IC1.4 138.775,68.725 139,68.5 139,66 ; C17.1 139,66
NetC19_1: C19.1 C20.2 IC1.3 | length 8.2
  Top Layer w0.203: C20.2 C19.1 135.484,66.984 136.5,68 137.5,68 138.125,68.625 IC1.3
NetC21_1: C21.1 IC1.2 | length 40
  Top Layer w0.203: C21.1 v1(121.25,85.5) ; v1(121.25,71.5) 136.25,71.5 136.594,71.156 136.668,71.156 137.475,70.35 IC1.2
  Bottom Layer w0.203: v1(121.25,71.5) v1(121.25,85.5)
NetC22_1: C22.1 IC1.1 | length 19.6
  Top Layer w0.203: C22.1 136.5,70.75 136.825,70.425 IC1.1
NetC24_1: C24.1 IC2.3 R8.1 R9.2 TP13.1 | length 30.7
  Top Layer w0.203: IC2.3 102.135,88.135 v1(102.25,88.25) ; TP13.1 103.5,71.282 R8.1 R9.2 105.5,62.1 C24.1
  Bottom Layer w0.203: v1(102.25,88.25) 102.25,84 103.375,82.875 TP13.1@103.375,82.625
NetC24_2: C24.2 IC4.10 | length 11.5
  Top Layer w0.203: C24.2 v1(114.25,62) ; IC4.10 114,54.75 v1(114.25,55)
  Bottom Layer w0.203: v1(114.25,55) v1(114.25,62)
NetC25_1: C25.1 R19.2 | length 20
  Top Layer w0.203: C25.1 111.75,77.85 111.75,79.5 112.75,80.5 v1(113.75,80.5) ; R19.2 v1(113.5,94.5)
  Bottom Layer w0.203: v1(113.5,94.5) 113.5,90.204 114,89.704 114,81.75 113.75,81.5 v1(113.75,80.5)
NetC27_1: C27.1 D5.2 IC6.1
NetC27_2: C27.2 D6.2 IC6.6 L2.1
NetC32_1: C32.1 C33.1 IC9.4
NetC32_2: C32.2 R33.2
NetC34_1: C34.1 MIC1.1 R35.1 | length 8.8
  Top Layer w0.203: MIC1.1 114.47,35 116.951,35 R35.1 C34.1
Netc35_1: c35.1 CN2.6 R2.1 U1.17 | length 38.2
  Top Layer w0.203: v1(134.75,102) v1(142.75,102) ; v1(134.75,108.75) U1.17 ; v1(149,103.25) 152,103.25 154.5,103.25 155.016,102.734 c35.1 157.44,101.5 CN2.6 160.06,104 R2.1
  Bottom Layer w0.203: v1(134.75,102) v1(134.75,108.75) ; v1(142.75,102) 144,103.25 v1(149,103.25)
NetC36_1: C36.1 IC2.5 R20.1 R21.2 TP16.1 | length 2.2
  Top Layer w0.203: R21.2 R20.1
NetC36_2: C36.2 IC4.6 | length 30.3
  Top Layer w0.203: C36.2 v1(102.5,62.25) ; v1(102.5,57.75) v1(113.25,57.75) ; IC4.6 112.725,52.25 112.75,52.25 113,52 v1(114,52)
  Bottom Layer w0.203: v1(102.5,57.75) v1(102.5,62.25) ; v1(113.25,57.75) 113.25,53 114,52.25 v1(114,52)
NetC37_1: C37.1 R31.2 | length 12.6
  Top Layer w0.203: 88.65,105.25 88.734,105.166 ; R31.2 88.734,86.266 91,84 91,79.75 91.25,79.5 C37.1
NetCN1_1: CN1.1 D1.1 TP18.1
NetCN2_2: CN2.2 R5.1 U1.3 | length 22.7
  Top Layer w0.203: U1.3 141.75,112.75 143,114 155.1,114 CN2.2 160.834,111.6 R5.1
NetCN2_3: CN2.3 R4.1 U1.5 | length 32.6
  Top Layer w0.203: U1.5 140.75,113.5 144.5,117.25 v1(155.25,117.25) ; v1(155.31,109.06) CN2.3 157.56,109 R4.1
  Bottom Layer w0.203: v1(155.25,117.25) 155.31,117.19 v1(155.31,109.06)
NetCN2_4: CN2.4 U1.1 | length 19.3
  Top Layer w0.203: U1.1 142.875,111 v1(154.5,111) ; v1(154.5,106.5) 154.52,106.52 CN2.4
  Bottom Layer w0.203: v1(154.5,106.5) v1(154.5,111)
NetCN2_5: CN2.5 R3.1 U1.2 | length 29.7
  Top Layer w0.203: U1.2 142.25,112.25 142.5,112.5 v1(153.75,112.5) ; v1(153.75,104) 153.77,103.98 CN2.5 160,106.48 R3.1@160.964,106.48
  Bottom Layer w0.203: v1(153.75,104) v1(153.75,112.5)
NetCN2_7: CN2.7 R1.1 | length 5.1
  Top Layer w0.203: CN2.7 159.65,98.9 160.984,100.234 R1.1
NetD1_2: D1.2 PS1.1
NetD2_2: D2.2 IC9.1 L1.1
NetD3_1: D3.1 R14.2
NetD4_1: D4.1 R15.1
NetFB1_1: FB1.1 PS1.2
NetIC1_9: IC1.9 TP9.1 U1.73 | length 50.7
  Top Layer w0.203: U1.73 141.75,94.25 142.25,93.75 v1(152,93.75) ; IC1.9 142.025,68.75 142.275,68.5 v1(152,68.5) 153.25,68.5 154.5,67.25 TP9.1@154.75,67.25
  Bottom Layer w0.203: v1(152,68.5) v1(152,93.75)
NetIC1_10: IC1.10 TP8.1 U1.51 | length 53.1
  Top Layer w0.203: U1.51 130.75,94.075 129.5,92.825 129.5,91 131,89.5 v1(145.5,89.5) ; IC1.10@142.675,69.5 v1(145.5,69.5) TP8.1
  Bottom Layer w0.203: v1(145.5,69.5) v1(145.5,89.5)
NetIC1_11: IC1.11 TP7.1 U1.52 | length 53.2
  Top Layer w0.203: U1.52 131.25,94 130.25,93 130.25,91 131,90.25 v1(141.25,90.25) ; v1(141.25,78.5) TP7.1 ; IC1.11 152.95,75.45 v1(153.25,75.5)
  Bottom Layer w0.203: v1(141.25,78.5) v1(141.25,90.25) ; v1(153.25,75.5) TP7.1
NetIC1_12: IC1.12 TP6.1 U1.9 | length 74.2
  Top Layer w0.203: U1.9 138.75,112.25 141,114.5 TP6.1 ; IC1.12 142.025,74.475 142.25,74.25 v1(151.25,74.25)
  Bottom Layer w0.203: TP6.1@141,119.25 141.25,119 150.25,119 151.25,118 v1(151.25,74.25) ; TP6.1@141,119.75 TP6.1@141.25,119.5
NetIC1_15: IC1.15 TP5.1 U1.85 | length 45.6
  Top Layer w0.203: v1(138.25,77.5) 139.25,77.5 140.075,76.675 IC1.15 ; v1(138.25,87.5) v1(144.75,87.5) TP5.1 ; U1.85 145.75,101.5 v1(146.25,102)
  Bottom Layer w0.203: v1(138.25,77.5) v1(138.25,87.5) ; v1(144.75,87.5) 144.75,96.5 146.25,98 v1(146.25,102)
NetIC3_2: IC3.2 R11.2 | length 3.5
  Top Layer w0.203: R11.2 98,117.75 98.661,117.089 IC3.2
NetIC3_3: IC3.3 R13.2 | length 3.5
  Top Layer w0.203: R13.2 98,115.25 98.569,115.819 IC3.3
NetIC3_9: IC3.9 R16.2 | length 4.2
  Top Layer w0.203: IC3.9 106.741,112.009 107,111.75 107,111 107.5,110.5 108.484,110.5 R16.2@108.734,110.25
NetIC3_10: IC3.10 R18.2 | length 3.1
  Top Layer w0.203: IC3.10 107.221,113.279 107.5,113 R18.2
NetIC4_1: IC4.1 U1.91 | length 83.2
  Top Layer w0.203: IC4.1 108.25,54.775 108.25,55.5 109,56.25 129.25,56.25 ; v1(133,103.5) 133,104 133.5,104.5 U1.91
  Bottom Layer w0.203: 129.25,56.25 129.25,94.25 133,98 v1(133,103.5)
  other v1: 129.25,57.25
NetIC4_5: IC4.5 U1.90 | length 87.6
  Top Layer w0.203: IC4.5 108.25,52.725 108.25,51.75 108.75,51.25 v1(121.25,51.25) ; v1(121.25,52.75) v1(130,52.75) ; v1(134,103.25) 134.75,104 U1.90
  Bottom Layer w0.203: v1(121.25,51.25) v1(121.25,52.75) ; v1(130,52.75) 130,94.25 134,98.25 v1(134,103.25)
NetIC4_7: IC4.7 R23.2 R26.1 TP14.1 U1.7 | length 114.8
  Top Layer w0.203: R26.1@92.766,53 95.234,53 95.234,51.266 96,50.5 v1(110.5,50.5) ; v1(110.5,52.5) 111.25,53.25 IC4.7 114,53.25 114.5,52.75 v1(116,52.75) ; v1(116,113) v1(130.25,113) ; v1@139,109 139.75,109.75 U1.7
  Bottom Layer w0.203: v1(110.5,50.5) v1(110.5,52.5) ; v1(116,52.75) TP14.1 v1(116,113) ; v1(130.25,113) 132.75,113 136.75,109 v1(138.875,109)
NetIC4_9: IC4.9 R10.2 R12.1 TP11.1 U1.6 | length 112.9
  Top Layer w0.203: R12.1 R10.2 95.234,56.984 95.75,57.5 101,57.5 101.5,57 v1(111,57) ; v1(111,54.5) 111.25,54.25 IC4.9 115.25,54.25 116,55 v1(117.25,55) ; v1(117.25,112) v1(129.75,112) ; v1(139,108) 140.25,109.25 U1.6
  Bottom Layer w0.203: v1(111,54.5) v1(111,57) ; v1(117.25,55) TP11.1 v1(117.25,112) ; v1(129.75,112) 132.75,112 136.75,108 v1(139,108)
NetIC6_3: IC6.3 R17.1 R28.2
NetIC7_2: IC7.2 R22.2
NetIC7_3: IC7.3 R24.2
NetIC7_9: IC7.9 R25.2 | length 4.7
  Top Layer w0.203: IC7.9 107.54,97.46 108,97 R25.2
NetIC7_10: IC7.10 R27.2 | length 4.8
  Top Layer w0.203: IC7.10 107.48,98.73 108.25,99.5 R27.2
NetIC9_5: IC9.5 R32.2 R34.2
NetR7_1: R7.1 U1.4 | length 26.9
  Top Layer w0.203: U1.4 141.25,113 144.5,116.25 162.5,116.25 163.016,115.734 R7.1
NetR36_1: R36.1 U1.53 | length 12.7
  Top Layer w0.203: v1(131,85.5) 131,82.766 R36.1 ; v1(131,92.5) 131.75,93.25 U1.53
  Bottom Layer w0.203: v1(131,85.5) v1(131,92.5)
NetX1_2: X1.2 X1.4 | length 11.4
  Top Layer w0.203: X1.4 128.15,114.6 127.75,115 127.75,117.25 128.75,118.25 133,118.25 133.4,117.85 X1.2
R-CH: CON1.3 IC5.2 TP26.1 | length 43.3
  Top Layer w0.203: TP26.1 74.1,35.9 CON1.3 81.65,35.9 85.25,39.5 v1(105.25,39.5) ; v1(105.25,46.75) IC5.2
  Bottom Layer w0.203: v1(105.25,39.5) v1(105.25,46.75)
R_SW_A_1: IC2.2 IC3.1 IC3.4 IC3.8 IC3.11 R19.1 | length 51.2
  Top Layer w0.203: IC3.4 101.75,114.549 ; IC3.1 101.391,118.359 101.75,118 101.75,114.549 ; IC2.2 102.865,86.865 v1(103,87) ; v1(102.75,94.5) 106.75,94.5 R19.1 ; v1(103,109) 103,111.5 ; IC3.11@105.661,114.5 IC3.11 103,114.549 ; IC3.8 103.761,110.739 103,111.5 ; 101.75,114.549 103,114.549 ; 103,111.5 103,114.549
  Bottom Layer w0.203: v1(103,87) 102.91,87.09 102.91,94.34 v1(102.75,94.5) 102.75,108.75 v1(103,109)
R_SW_A_2: IC2.6 IC7.1 IC7.4 IC7.8 IC7.11 R31.1 | length 37.2
  Top Layer w0.203: R31.1 90.881,88.135 IC2.6 98.635,88.135 v1(98.75,88.25) ; v1(99,95.25) 101.81,95.25 103.28,96.72 ; IC7.4 102.75,100 ; IC7.1 101.44,103.81 102.75,102.5 102.75,100 ; IC7.8 103.81,96.19 103.28,96.72 ; IC7.11 102.75,100 ; 102.75,100 102.75,97.25 103.28,96.72
  Bottom Layer w0.203: v1(98.75,88.25) 98.75,95 v1(99,95.25)
R_SW_B_1: C21.2 IC2.1 R11.1 R13.1 R16.1 R18.1 TP12.1 | length 69.6
  Top Layer w0.203: R13.1 R11.1 94.984,118.984 95.75,119.75 v1(112.5,119.75) ; IC2.1 110.639,85.595 C21.2 110.75,85.516 v1(110.75,87.25) ; v1(110.75,109) 110.766,109.016 R16.1 R18.1 v1(112.5,113)
  Bottom Layer w0.203: v1(110.75,87.25) 110.75,89.5 ; v1(110.75,109) 110.75,89.5 ; TP12.1 110.75,89.5 ; v1(112.5,113) v1(112.5,119.75)
R_SW_B_2: C22.2 IC2.7 R22.1 R24.1 R25.1 R27.1 TP15.1 | length 63.1
  Top Layer w0.203: v1(92.5,87) 92.5,86.98 92.615,86.865 IC2.7 ; v1(92.5,92.5) v1(114.5,92.5) ; R27.1 R25.1 v1(114.5,97) ; v1(114.5,70.75) C22.2
  Bottom Layer w0.203: v1(92.5,87) v1(92.5,92.5) ; v1(114.5,70.75) v1(114.5,92.5) v1(114.5,97)
SCK: CONN2.11 CONN3.5 CONN3.8 CONN3.16 U1.34 | length 124.5
  Top Layer w0.203: v1(118,86.25) v1(140,86.25) ; v1(118,105.75) 118.25,106 125.64,106 126.64,105 U1.34 ; v1(140,50.5) v1(146.5,50.5)
  Bottom Layer w0.203: v1(118,86.25) v1(118,105.75) ; CONN2.11 140.445,31.335 140.445,42.161 CONN3.8 140.17,47.516 CONN3.16 140,48.194 v1(140,50.5) v1(140,86.25) ; CONN3.5 146.5,46.226 v1(146.5,50.5)
SD_CS: CONN2.12 CONN3.15 U1.39 | length 108.2
  Top Layer w0.203: v1(121,88.75) v1(142.5,88.75) ; v1(121,103.75) 126.07,103.75 127.32,102.5 U1.39 ; v1(138,42.5) v1(141.5,42.5)
  Bottom Layer w0.203: v1(121,88.75) v1(121,103.75) ; CONN2.12 137.775,31.205 137.775,36.499 138,36.724 v1(138,42.5) ; v1(141.5,42.5) 141.508,42.508 141.508,44.474 141.505,44.477 141.505,45.475 141.508,45.478 141.508,46.258 142.71,47.46 CONN3.15 ; CONN3.15@142.5,48.024 v1(142.5,88.75)
SSEL: CONN1.12 CONN3.1 U1.35 | length 118.4
  Top Layer w0.203: v1(119,87) v1(136,87) ; v1(119,105.064) 119.096,105.16 125.905,105.16 126.566,104.5 U1.35 ; v1(136.428,41.75) 154.75,41.75 155.41,42.41 CONN3.1
  Bottom Layer w0.203: v1(119,87) v1(119,105.064) ; v1(136,87) 136,49 136.295,48.705 136.295,41.884 v1(136.428,41.75) 136.428,36 CONN1.12
T_CS: CONN1.13 CONN3.4 U1.40 | length 115.8
  Top Layer w0.203: v1(122,33.25) 134,33.25 ; v1(122,103) 126.245,103 127.152,102.094 127.156,102.094 127.25,102 U1.40 ; CONN1.13 134.03,33.28 134,33.25 ; v1(145.5,33.75) 145.5,33.5 145.25,33.25 134,33.25
  Bottom Layer w0.203: v1(122,33.25) v1(122,103) ; v1(145.5,33.75) 145.5,42.686 CONN3.4
T_IRQ: CONN1.14 CONN3.12 U1.43 | length 108.3
  Top Layer w0.203: v1(123,36) CONN1.14 ; v1(123,99.25) 123.597,99.847 123.828,99.847 123.832,99.844 125.713,99.844 125.716,99.847 126.597,99.847 127.25,100.5 U1.43 ; v1(131.5,46.75) 131.594,46.656 148.962,46.656 CONN3.12
  Bottom Layer w0.203: v1(123,36) v1(123,99.25) ; CONN1.14 131.5,36.01 v1(131.5,46.75)
VCC: c1.1 c2.1 c3.1 c4.1 c5.1 c6.1 c9.1 c10.1 c11.1 c12.1 C13.2 C14.1 C30.1 CN2.1 CONN1.2 CONN3.7 CONN3.11 CONN3.14 IC1.14 IC4.8 IC5.8 L1.2 R1.2 R2.2 R3.2 R4.2 R5.2 R7.2 R32.1 R36.2 TP2.1 TP21.1 TP23.1 U1.10 U1.12 U1.19 U1.28 U1.42 U1.54 U1.71 U1.84 U1.96 | length 303.7
  Top Layer w0.203: IC4.8 115,53.75 v1(115,53.5) ; IC5.8 v1(118.75,46.25) ; v1(115.25,82.75) R36.2 128.984,81.5 ; v1(115.25,101.5) c5.1 123.734,100.516 124,100.25 125.544,100.25 125.547,100.253 126.263,100.253 126.658,100.649 126.658,100.658 127,101 U1.42 130,101 131,100 132.25,100 ; v1(118.75,42.5) 119.5,43.25 v1(144,43.25) ; c6.1@127.016,110.25 127.016,108.734 127.75,108 U1.28 133.75,108 ; c9.1 c10.1 128.984,81.5 ; c4.1@132.25,91.516 U1.54 132.25,100 ; U1.19 133.75,108 ; U1.12 137.25,109.25 ; U1.10 138.25,109.75 137.75,109.25 137.25,109.25 ; CONN3.7@140.089,44.976 CONN3.7 140.17,43.33 ; IC1.14 140.725,77 ; c3.1@140.75,92.25 U1.71 140.75,100 ; v1(141.5,77) 140.725,77 ; CONN3.14 146.976,49.75 v1(162,49.75) ; c2.1 147.75,101.5 ; c1.1 149.766,106.516 149.5,106.25 147.75,106.25 ; CONN3.11 152.87,49.75 ; CN2.1 157.61,114.25 R7.2 160.984,113.266 161.25,113 162.75,113 163.016,112.734 R5.2 R3.2 R2.2 R1.2 c11.1 c12.1 ; 128.984,81.5 138.5,81.5 139,82 139,83 139.5,83.5 C14.1 C13.2 140.25,80.5 139.75,80 139.75,79 140.725,78.025 140.725,77 ; 132.25,100 141.5,100 142.5,101 U1.84 146.75,101 147.25,101.5 147.75,101.5 ; 133.75,108 137.25,108 137.25,108.25 ; 137.25,108.25 137.25,107.5 137.75,107 U1.96 146.5,107 146.5,106.99 147.24,106.25 147.75,106.25 ; 137.25,108.25 137.25,109.25 ; 147.75,101.5 147.75,106.25
  Bottom Layer w0.203: v1(115,53.5) 115,49 117.75,46.25 v1(118.75,46.25) v1(118.75,42.5) ; v1(115.25,82.75) v1(115.25,101.5) ; CONN3.7 140.17,45.67 141.5,47 v1(141.5,77) ; v1(144,43.25) 144.045,43.295 144.045,45.795 145.25,47 CONN3.14 ; CN2.1 TP2.1 ; CONN1.2 161.97,39.22 TP23.1 v1(162,49.75)
VIN: C31.1 C40.1 IC6.4 IC6.5 IC9.8 R15.2 SW1.2 TP20.1
VIN_SW: C29.1 C38.1 FB1.2 R14.1 SW1.1 TP19.1
VINL: CON2.2 IC4.4 IC5.6 R23.1 TP27.1 | length 47
  Top Layer w0.203: TP27.1 97.25,47.25 ; R23.1@97.25,52.984 R23.1@97.266,53 ; 97.266,47.266 97.25,47.25 ; R23.1 106.5,53.25 ; v1(103.25,47.75) 100.3,47.75 CON2.2 99.7,47.25 97.25,47.25 ; v1(106.5,43) v1(114.5,43) ; v1(106.5,52.5) 106.5,53.25 ; IC4.4 106.5,53.25 ; IC5.6 114,45.25 v1(114.5,44.75)
  Bottom Layer w0.203: v1(103.25,47.75) 106.5,47.75 ; v1(106.5,43) 106.5,47.75 ; v1(106.5,52.5) 106.5,47.75 ; v1(114.5,43) v1(114.5,44.75)
VINR: CON2.3 IC4.2 IC5.10 R10.1 TP25.1 | length 49.8
  Top Layer w0.203: TP25.1 96.7,36 CON2.3 99.65,35.9 v1(102.25,38.5) ; R10.1 103.75,55.75 v1(105.25,54.25) IC4.2 ; v1(102.25,47) 103.75,47 v1(105.25,48.5) 112.5,48.5 113,48 113,47.275 IC5.10
  Bottom Layer w0.203: v1(102.25,38.5) v1(102.25,47) ; v1(105.25,48.5) v1(105.25,54.25)
pads on no net: c1.0 c2.0 c3.0 c4.0 c5.0 c6.0 c7.0 c8.0 c9.0 c10.0 c11.0 c12.0 C13.0 C14.0 C15.0 C16.0 C17.0 C18.0 C19.0 C20.0 C21.0 C22.0 C23.0 C26.0 C27.0 C28.0 C32.0 C33.0 C34.0 c35.0 C38.0 C39.0 C40.0 CON1. CON1.4 CON2. CON2.4 R1.0 R2.0 R3.0 R4.0 R5.0 R6.0 R7.0 R8.0 R9.0 R10.0 R11.0 R12.0 R13.0 R14.0 R15.0 R16.0 R17.0 R18.0 R19.0 R20.0 R21.0 R22.0 R23.0 R24.0 R25.0 R26.0 R27.0 R28.0 R31.0 R32.0 R33.0 R34.0 R35.0 R36.0 U1.8 U1.13 U1.14 U1.16 U1.18 U1.20 U1.21 U1.24 U1.25 U1.26 U1.27 U1.29 U1.30 U1.32 U1.33 U1.44 U1.45 U1.50 U1.56 U1.64 U1.65 U1.66 U1.67 U1.68 U1.69 U1.70 U1.74 U1.82 U1.86 U1.87 U1.88 U1.89 U1.98 U1.99 U1.100

## Polygon pours and split planes (outlines as drawn)
GND on Top Layer "Top Layer-No Net" (solid, pour order 12): 171.25,121.25 123.75,121.25 123.75,72.75 171.25,72.75
GND on Top Layer "Top Layer-No Net" (solid, pour order 10): 171.25,54.5 120,54.5 120,26 171.25,26
AGND on Top Layer "Top Layer-No Net" (solid, pour order 6): 120,72.5 171.25,72.5 171.25,55 120,55

## Keep-outs
Keep-Out Layer:
  circle w0.254: c48,93.75 r3.25
  circle w0.254: c164.5,64 r3.25
  circle w0.254: c47.25,61 r3.25
  circle w0.254: c164.5,87 r3.25
  lines w0.05: 43.25,26.75 122.5,26.75 170.5,26.75 170.5,120.5 43.25,120.5 43.25,26.75

## Silkscreen, mask and mechanical layers (free items; w line width, h text height)
Mechanical 1:
  lines w0.05: 42.5,26 171.25,26 171.25,121.25 42.5,121.25 42.5,26

## Text inside footprints (layer, text, board x,y; h text height)
C14: Top Overlay "+" at 140.015,84.135 h1
C16: Top Overlay "+" at 139.515,60.885 h1
C17: Top Overlay "+" at 139.515,66.635 h1
C19: Top Overlay "+" at 134.265,66.385 h1
C21: Top Overlay "+" at 113.985,84.865 h1 r180
C22: Top Overlay "+" at 119.485,70.115 h1 r180
C24: Top Overlay "+" at 103.471,63.727 h1
C25: Top Overlay "+" at 113.779,76.023 h1 r180
C29: Top Overlay "+" at 57.959,114.321 h1
C30: Top Overlay "+" at 53.992,70.447 h1 r180
C31: Top Overlay "+" at 76.492,63.697 h1 r180
C36: Top Overlay "+" at 87.471,63.977 h1
C37: Top Overlay "+" at 96.029,77.773 h1 r180
D1: Top Overlay "K" at 67.774,106.303 h1; Top Overlay "A" at 63.456,106.278 h1
D2: Top Overlay "K" at 62.69,87.818 h1; Top Overlay "A" at 69.675,87.691 h1
D3: Top Overlay "A" at 44.441,29.619 h1
D4: Top Overlay "A" at 65.067,29.869 h1